# Altium PCB BUCK2.PcbDoc
Units mil, origin at the board's own origin, x right, y up, seen from the top; angles counter-clockwise.
Board outline 6000 x 4000 mil, 2 copper layers (Top Layer, Bottom Layer); 31 components, 18 nets, 82 pads, 41 vias.
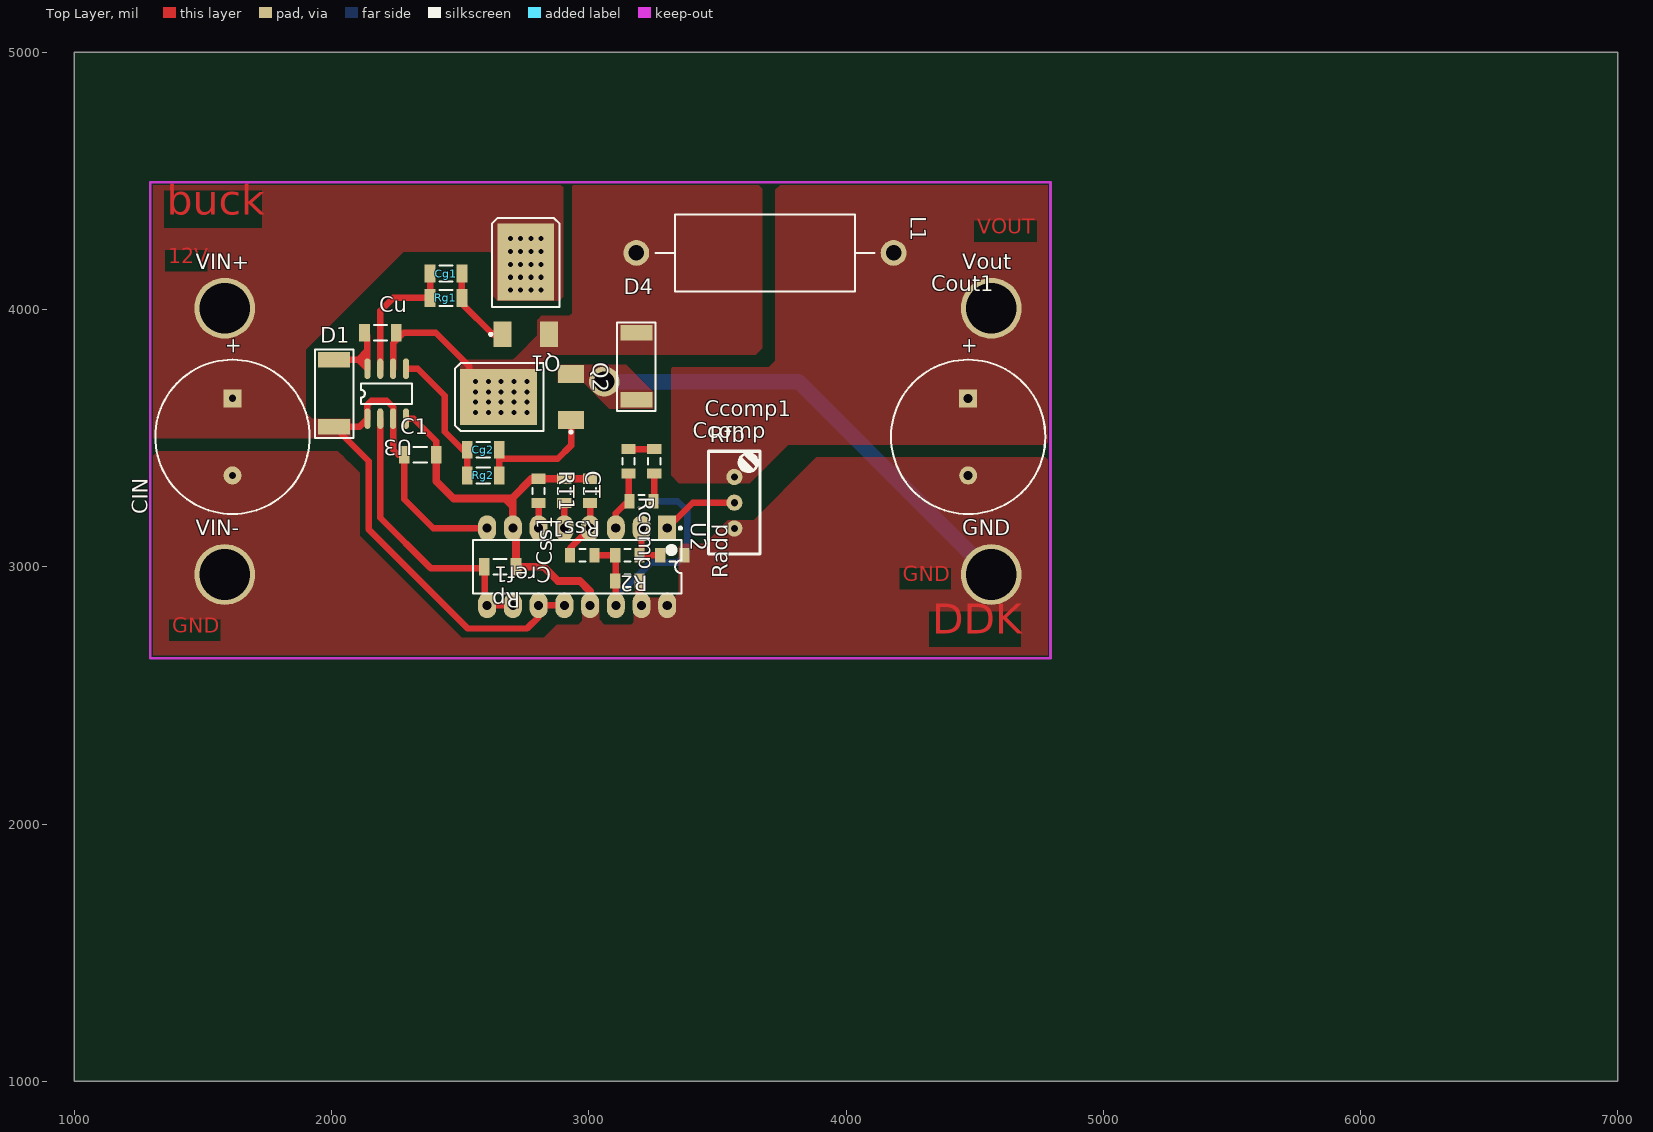
[diagram p0: Top Layer view]
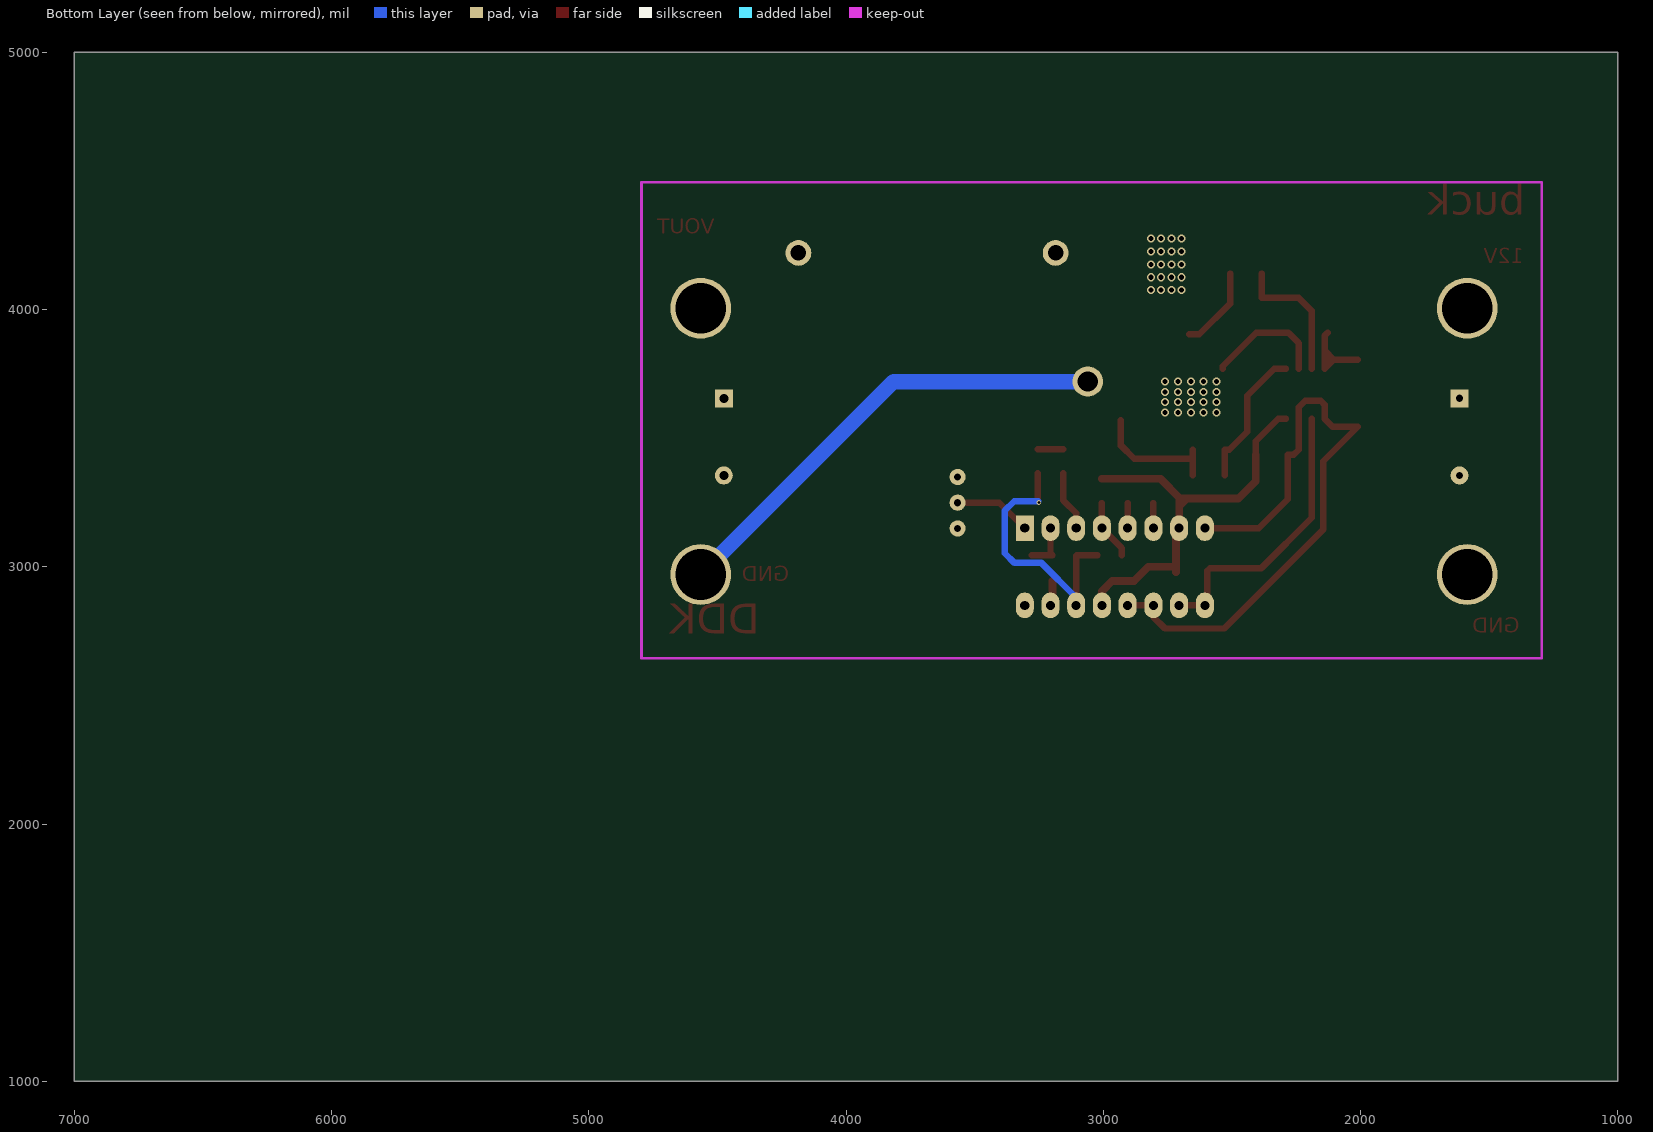
[diagram p1: Bottom Layer view, seen from below]

## Layer stack, top to bottom
Top Layer: signal copper 1.4
Dielectric: dielectric 12.6, FR-4, Dk 4.8
Bottom Layer: signal copper 1.4

## Board outline
1000,1000 7000,1000 7000,5000 1000,5000

## Design rules (kind name [scope] priority, off if disabled: settings)
Clearance [All] p1: gap=6
PlaneConnect [All] p1: planeconnectstyle=Direct reliefexpansion=20 reliefentries=4 reliefconductorwidth=10 reliefairgap=10
PolygonConnect [All] p1: connectstyle=Direct reliefconductorwidth=10 reliefentries=4 polygonreliefangle="90 Angle" airgapwidth=10
RoutingVias [All] p1: holewidth=28 width=50 viastyle="Through Hole" minholewidth=28 minwidth=50 maxholewidth=28 maxwidth=50
SolderMaskExpansion [All] p1: expansion=4
Width [All] p1: maxlimit=60 minlimit=17 preferedwidth=20 minimp=50.000000 maximp=50.000000 favimp=50.000000
27 further rules are at their usual default settings.

## Components (designator, comment, footprint, x,y, rotation, side; value= is the part's Value field where it differs from the comment)
C1 "Cap" 1206(2) 2345,3435 r0 top
Ccomp "22nF" C2012 3255,3410 r270 top
Ccomp1 "Cap" C2012 3205,3255 r180 top
Cg1 "Cap" 1206(2) 2445,4140 r0 top
Cg2 "Cap" 1206(2) 2590,3455 r180 top
CIN "Cap Pol1" RB7.6-15#1 1615,3505 r90 top
Cout1 "Cap2" RB7.6-15#2 4475,3505 r90 top
Cref1 "0.1uF" C2012 3150,2945 r180 top
Css1 "3.3uF" C2012 2975,3045 r180 top
CT "1nF" C2012 2905,3295 r270 top
Cu "Cap" 1206(2) 2190,3910 r180 top
D1 "D Schottky" SK54 2010,3675 r90 top
D4 "Diode 1N4004" SK54 3185,3780 r90 top
GND "PIN" PIN 4565,2970 r0 top
L1 "Inductor" AXIAL-1.0 3685,4220 r0 top
Q1 "MOSFET-N" nmos 2750,4100 r270 top
Q2 "MOSFET-N" nmos 2735,3655 r0 top
R2 "5.1K" R2012 3150,3045 r180 top
Radd "Res" R2012 3325,3045 r180 top
Rcomp "51K" R2012 3155,3410 r270 top
Rfb "100k" pot（长方形） 3555,3150 r90 top
Rg1 "Res1" 1206(2) 2445,4045 r0 top
Rg2 "Res1" 1206(2) 2590,3355 r180 top
Rp "Res1" 1206(2) 2655,3000 r180 top
Rss1 "10K" R2012 3005,3295 r270 top
RT1 "Res" R2012 2805,3295 r270 top
U2 "TL494" DIP-16 2955,3000 r270 top
U3 "IR2104S" ir2104 2230,3670 r180 top
VIN+ "PIN" PIN 1585,4005 r0 top
VIN- "PIN" PIN 1585,2970 r0 top
Vout "PIN" PIN 4565,4005 r0 top

## Footprints (in the part's own frame and the unit in brackets; to place one, negate y for a bottom-side part, rotate by r counter-clockwise, add the part's x,y. Pads: shape width x height; smd on the part's side, far side on the other; paste and mask are expansions set on the pad)
1206(2) [mm]
  rect 1.05x1.75 smd: 1(-1.575,0) 2(1.575,0)
  silkscreen extent -0.65,-0.77 0.65,0.77, body extent -1.6,-0.8 1.6,0.8, height 1.6
AXIAL-1.0 [mil] "Axial Device, Thru-Hole; 2 Leads; 1.0 in Pin Spacing"
  round 100 hole 60: 1(-500,0) 2(500,0)
  silkscreen extent -425,-150 425,150
C2012 [mm] "Chip Capacitor, 2-Leads, Body 2.0x1.2mm, IPC Low Density"
  rect 1x1.45 smd: 1(-1.2,0) 2(1.2,0)
  silkscreen extent -0.3,-0.63 0.3,0.63, body extent -0.98,-0.6 1.02,0.6, height 0.5
DIP-16 [mil] "DIP; 16 Leads; Row Spacing 7.62 mm; Pitch 2.54 mm"
  rect 100x70 hole 35.43: 1(-150,350)
  oval 100x70 hole 35.43: 2(-150,250) 3(-150,150) 4(-150,50) 5(-150,-50) 6(-150,-150) 7(-150,-250) 8(-150,-350) 9(150,-350) 10(150,-250) 11(150,-150) 12(150,-50) 15(150,250) 16(150,350)
  oval 100x70 hole 35: 13(150,50) 14(150,150)
  silkscreen extent -155,-406 104,406, body extent -142,-405 142,405, height 200
ir2104 [mil]
  oval 23.62x80 smd: 1(90.47,94.24) 2(40.47,94.24) 3(-9.53,94.24) 4(-59.53,94.24) 5(-59.53,-99.76) 6(-9.53,-99.76) 7(40.47,-99.76) 8(90.47,-99.76)
  silkscreen extent -83,-43 116,37
nmos [mil]
  rect 100x70 smd: 1(196.22,-84.76) 3(196.22,94.76)
  rect 299.21x218.5 smd: 2(-85.51,5)
  silkscreen extent -256,-136 201,137
PIN [mm]
  round 6 hole 5: 1(0,0)
pot（长方形） [mm]
  round 1.6 hole 0.7: 1(5.055,-0.279) 2(2.515,-0.279) 3(-0.025,-0.279)
  silkscreen extent -2.57,-2.82 7.59,2.26
R2012 [mm] "Chip Resistor, 2-Leads, Body 2.0x1.2mm, IPC Low Density"
  rect 1x1.4 smd: 1(-1.2,0) 2(1.2,0)
  silkscreen extent -0.3,-0.6 0.3,0.6, body extent -0.98,-0.6 1.02,0.6, height 0.5
RB7.6-15#1 [mil] "Polarized Capacitor (Radial); 2 Leads"
  rect 70x70 hole 27.56: 1(150,0)
  round 70 hole 27.56: 2(-150,0)
  silkscreen extent -300,-300 300,300
RB7.6-15#2 [mil] "Polarized Capacitor (Radial); 2 Leads"
  rect 70x70 hole 35: 1(150,0)
  round 70 hole 35: 2(-150,0)
  silkscreen extent -300,-300 300,300
SK54 [mm]
  rect 1.52x3.18 smd: 1(-3.305,0) 2(3.305,0)
  silkscreen extent -4.44,-1.91 4.32,1.91

## Part data
C1 Ccomp1 Cg1 Cg2 Cout1 Cu: "Capacitor"
Ccomp Cref1 CT: library part ----Cap, "0.1uF 0805"
CIN: "Polarized Capacitor (Radial)"
Css1: library part "----Cap Pol1", "10uF RAD0.1_"
D1: "Schottky Diode"
D4: "1 Amp General Purpose Rectifier"
Q1 Q2: "N-Channel MOSFET"
R2 Rcomp Rss1: library part ---Res1, "0805_"
Radd RT1: "贴片电阻"
Rfb: library part RPot, "Potentiometer"
Rg1 Rg2 Rp: "Resistor"
U3: "High and Low Side Driver"

## Free pads (board coordinates)
  round 118.11 hole 78.74: 1(3060,3720)

## Via types
v1: diameter 31.5, hole 19.68, Top Layer to Bottom Layer, 40 vias
v2: diameter 18, hole 13, Top Layer to Bottom Layer, 1 vias

## Nets (pads, with @x,y where several pads share a name; then routed paths per layer and width w, separated by ;. In a path a pad name is that pad's centre, name@x,y a point inside that pad or via, vN(x,y) a via of type N, cw(c..) or ccw(c..) an arc to the next point about the centre after c; other vN are vias at no path point)
5VREF: Ccomp1.1 Ccomp.2 Cref1.2 Css1.1 R2.2 U2.14 | length 1072
  Top Layer w25: Css1.1 R2.2 3105,3042.76 U2.14 ; Ccomp1.1@3255,3257.76 Ccomp.2
  Bottom Layer w25: U2.14 3105,2880 3240,3015 3345,3015 3382.66,3052.66 3382.66,3218.5 3346.16,3255 v2@3252.24,3255
  other v2: 3250,3250
12V: C1.1 CIN.1 D1.1 Q1.2 U2.8 U2.11 U2.12 U3.1 U3.3 VIN+.1 | length 2509.9
  Top Layer w25: U2.8 2395,3150 2282.99,3262.01 C1.1 2260,3435 2239.53,3455.47 U3.3 2239.53,3620.47 2215,3645 2155,3645 2139.53,3629.53 U3.1 2108.65,3544.88 D1.1 2145,3409.88 2145,3145 2530,2760 2760,2760 2805,2805 U2.11 U2.12
  other v1: 2695,4075.51 2735,4075.51 2775,4075.51 2815,4075.51 2695,4125.51 2735,4125.51 2775,4125.51 2815,4125.51 2695,4175.51 2735,4175.51 2775,4175.51 2815,4175.51 2695,4225.51 2735,4225.51 2775,4225.51 2815,4225.51 2695,4275.51 2735,4275.51 2775,4275.51 2815,4275.51
G1: Cg1.1 Rg1.1 U3.7 | length 534.1
  Top Layer w25: U3.7 2189.53,3994.53 2240,4045 Rg1.1 Cg1.1
G2: Cg2.2 Rg2.2 U3.5 | length 550.9
  Top Layer w25: U3.5 2335.24,3769.76 2440,3665 2440,3525 2510,3455 Cg2.2 Rg2.2
GND: C1.2 CIN.2 Cout1.2 Cref1.1 CT.1 D4.1 GND.1 pad.1 Q2.3 Radd.1 Rfb.3 Rp.1 Rss1.1 RT1.1 U2.7 U2.13 U2.15 U2.16 U3.4 VIN-.1 | length 3584.6
  Top Layer w25: U3.4 2319.24,3575.76 2407.01,3487.99 C1.2
  Top Layer w30: C1.2 2407.01,3332.99 2475,3265 2675,3265 ; 2705,3265 2705,3235 ; Rp.1@2717.01,2980 Rp.1 ; U2.13 3005,2905 2965,2945 2880,2945 2825,3000 Rp.1 ; Rss1.1 2777.24,3342.24 2700,3265 2675,3265 ; U2.15@3197.24,2857.76 Cref1.1 ; 2675,3265 2705,3235 ; 2705,3235 U2.7 2717.01,3137.99 Rp.1
  Bottom Layer w60: pad.1 3815,3720 GND.1
NetCcomp1_2: Ccomp1.2 Rcomp.2 U2.3 | length 233.5
  Top Layer w25: U2.3 3105,3207.76 3155,3257.76 Rcomp.2
NetCcomp_1: Ccomp.1 Rcomp.1 | length 100
  Top Layer w25: Rcomp.1 Ccomp.1
NetCg1_2: Cg1.2 Q1.1 Rg1.2 | length 324.6
  Top Layer w25: Cg1.2 2507.01,4022.99 2626.22,3903.78 Q1.1
NetCg2_1: Cg2.1 Q2.1 Rg2.1 | length 499.4
  Top Layer w25: Rg2.1 Cg2.1 ; 2652.01,3420 2880,3420 2931.22,3471.22 Q2.1
NetCss1_2: Css1.2 Rss1.2 U2.4 | length 234.8
  Top Layer w25: Css1.2 2927.76,3072.76 U2.4 Rss1.2
NetCT_2: CT.2 U2.5 | length 97.8
  Top Layer w25: U2.5 CT.2
NetCu_2: Cu.2 D1.2 U3.8 | length 369.7
  Top Layer w25: D1.2 2104.17,3805.12 ; Cu.2 2139.53,3898.46 2139.53,3840.48 ; U3.8@2134.65,3805.12 2104.17,3805.12 ; 2104.17,3805.12 U3.8 2139.53,3840.48 ; 2104.17,3805.12 2139.53,3840.48
NetR2_1: R2.1 Radd.2 U2.2 | length 188.7
  Top Layer w25: U2.2 3205,3052.76 R2.1 Radd.2
NetRfb_2: Rfb.2 U2.1 | length 302
  Top Layer w25: U2.1 3404,3249 Rfb.2
NetRT1_2: RT1.2 U2.6 | length 97.8
  Top Layer w25: U2.6 RT1.2
PWM: Rp.2 U2.9 U2.10 U3.2 | length 1111.8
  Top Layer w17: Rp.2@2585,2995 Rp.2@2595,2985 ; U2.9@2595,2865.51 U2.9@2610.51,2850
  Top Layer w25: U3.2 2189.53,3190.47 2385,2995 Rp.2@2585,2995 ; U2.9@2595,2865.51 Rp.2@2595,2985 ; U2.9@2610.51,2850 U2.10
VOUT: Cout1.1 L1.2 Rfb.1 Vout.1
VS: Cu.1 D4.2 L1.1 Q1.3 Q2.2 U3.6 | length 475.9
  Top Layer w25: U3.6 2239.53,3869.53 2280,3910 2405,3910 2535,3780 2535,3770
  other v1: 2559.49,3600 2609.49,3600 2659.49,3600 2709.49,3600 2759.49,3600 2559.49,3640 2609.49,3640 2659.49,3640 2709.49,3640 2759.49,3640 2559.49,3680 2609.49,3680 2659.49,3680 2709.49,3680 2759.49,3680 2559.49,3720 2609.49,3720 2659.49,3720 2709.49,3720 2759.49,3720

## Polygon pours and split planes (outlines as drawn)
12V on Top Layer "Top Layer-GND" (solid, remove dead copper, pour order 4): 1295,4495 1295,3500 2075,3500 2075,3575 1765,3575 1765,4230 2885,4230 2885,4495
12V on Top Layer "Top Layer-GND" (solid, remove dead copper, pour order 6): 1700,4275 1700,3540 1905,3540 1935,3570 1955,3570 1930,3570 1900,3600 1900,4200 1925,4225 1955,4225 2615,4225 2650,4190 2695,4235 2695,4275.51 1700.51,4275.51 1700,4275
VS on Top Layer "Top Layer-GND" (solid, remove dead copper, pour order 10): 2950,4495 3650,4495 3675,4470 3675,4175 3675,3850 3650,3825 3150,3825 2850,3825 2825,3800 2755,3730 2500,3730 2500,3780 2525,3805 2700,3805 2705,3805 2725,3825 2800,3900 2800,3950 2800,3960 2805,3965 2815,3975 2925,3975 2935,3985 2935,4095 2935,4480 2950,4495
12V on Top Layer "Top Layer-GND" (solid, remove dead copper, pour order 12): 2810,4485 2890,4485 2900,4475 2900,4290 2900,4050 2885,4035 2670,4035 2645,4035 2630,4050 2625,4055 2625,4280 2625,4415 2675,4465
GND on Top Layer "Top Layer-GND" (solid, remove dead copper, pour order 14): 1295,2645 1295,3425 1300,3425 1325,3450 1740,3450 2025,3450 2050,3425 2050,2750 2075,2725 2950,2725 2975,2750 2975,2865 2990,2880 3025,2880 3040,2865 3040,2750 3065,2725 3150,2725 3175,2750 3175,2855 3175,2870 3185,2880 3230,2880 3330,2880 3350,2900 3350,3075 3365,3090 3450,3090 3540,3180 3690,3180 3905,3180 4150,3425 4775,3425 4795,3405 4795,2645 1295,2645
GND on Top Layer "Top Layer-GND" (solid, pour order 22): 2785,2680 2785,2685 2875,2775 2950,2775 2960,2775 2980,2795 3030,2795 3040,2795 3060,2775 3155,2775 3165,2775 3185,2795 3210,2770 3210,2690
VOUT on Top Layer "Top Layer-GND" (solid, remove dead copper, pour order 24): 3725,4465 3755,4495 4795,4495 4795,3495 4775,3475 4415,3475 3775,3475 3625,3325 3485,3325 3475,3325 3450,3350 3450,3615 3450,3750 3475,3775 3675,3775 3700,3775 3725,3800 3725,4465
GND on Top Layer "Top Layer-GND" (solid, remove dead copper, pour order 28): 2880,3785 3145,3785 3250,3680 3250,3615 3080,3615 2980,3715 2880,3715
12V on Top Layer "Top Layer-GND" (solid, pour order 30): 1855,3795 1855,3800 2265,4210 2320,4265 2320,4340 1810,4340 1775,4305
GND on Top Layer "Top Layer-GND" (solid, pour order 32): 1930,2690 1935,2695 2490,2695 2535,2695 2110,3120 2110,3335 2110,3365 2025,3450 1890,3315 1890,3055
GND on Top Layer "Top Layer-GND" (solid, pour order 34): 4320,3425 3885,3425 3625,3165 3635,3155 3635,2975
VOUT on Top Layer "Top Layer-GND" (solid, pour order 36): 3535,3775 3325,3775 3320,3770 3320,3410 3320,3355 3350,3325 3505,3325 3505,3625 3615,3735

## Keep-outs
Keep-Out Layer:
  lines w10: 1295,2645 4795,2645 4795,4495 1295,4495 1295,2645

## Other copper
Top Layer:
  text "buck" at 1360,4330 h200
  text "VOUT" at 4510,4275 h100
  text "12V" at 1365,4160 h100
  text "GND" at 4220,2925 h100
  text "GND" at 1380,2725 h100
  text "DDK" at 4335,2700 h200

## Text inside footprints (layer, text, board x,y; h text height)
CIN: Top Overlay "+" at 1644.01,3825.15 h59.06 r90
Cout1: Top Overlay "+" at 4504.01,3825.15 h59.06 r90